# Altium PCB MotorDriver.PcbDoc
Units mm, origin at the board's own origin, x right, y up, seen from the top; angles counter-clockwise.
Board outline 57.78 x 52.83 mm, 2 copper layers (Top Layer, Bottom Layer); 15 components, 13 nets, 43 pads, 6 vias.
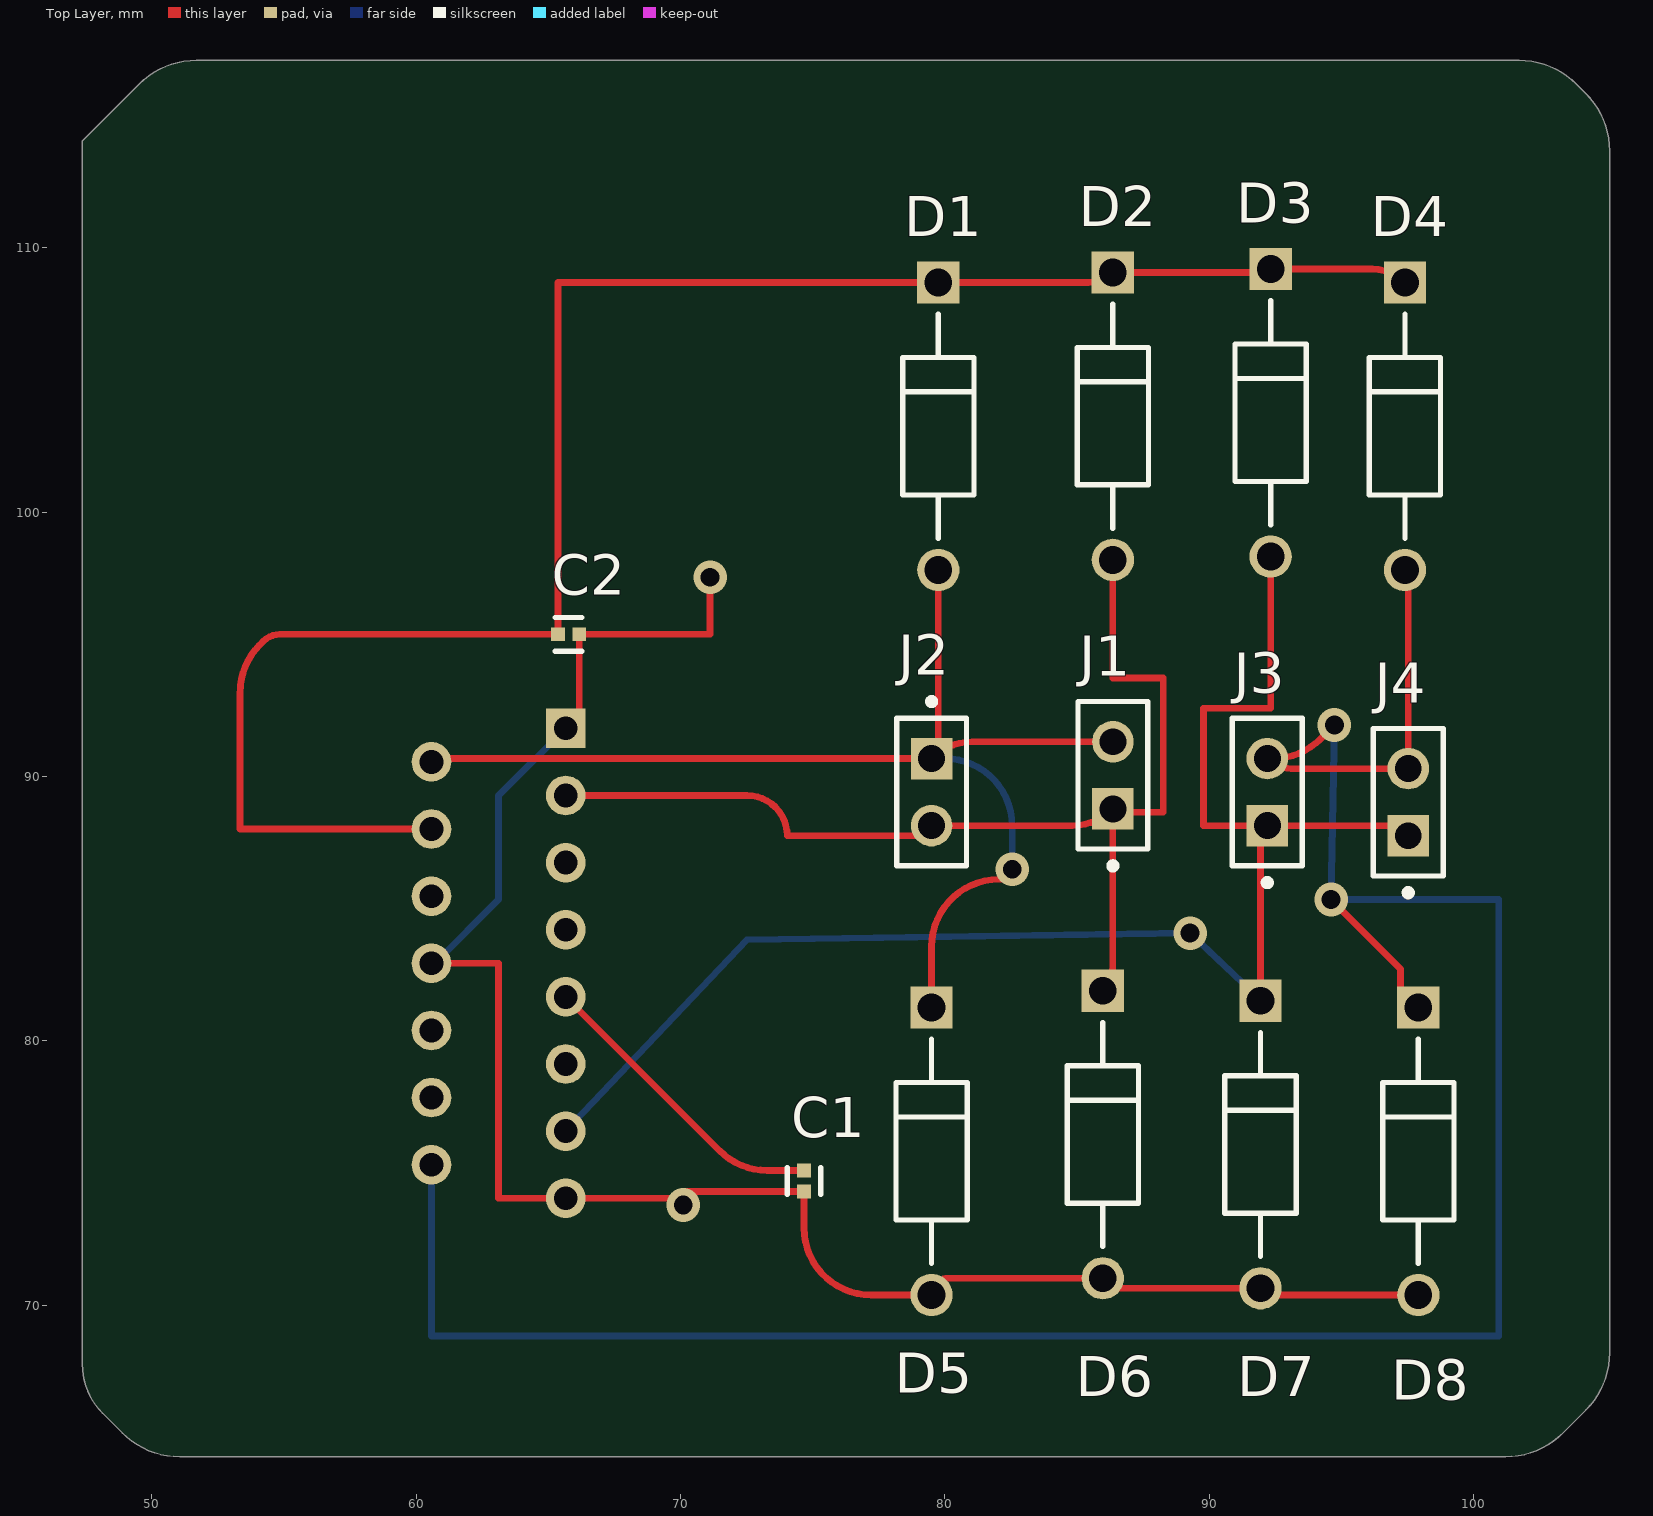
[diagram p0: Top Layer view]
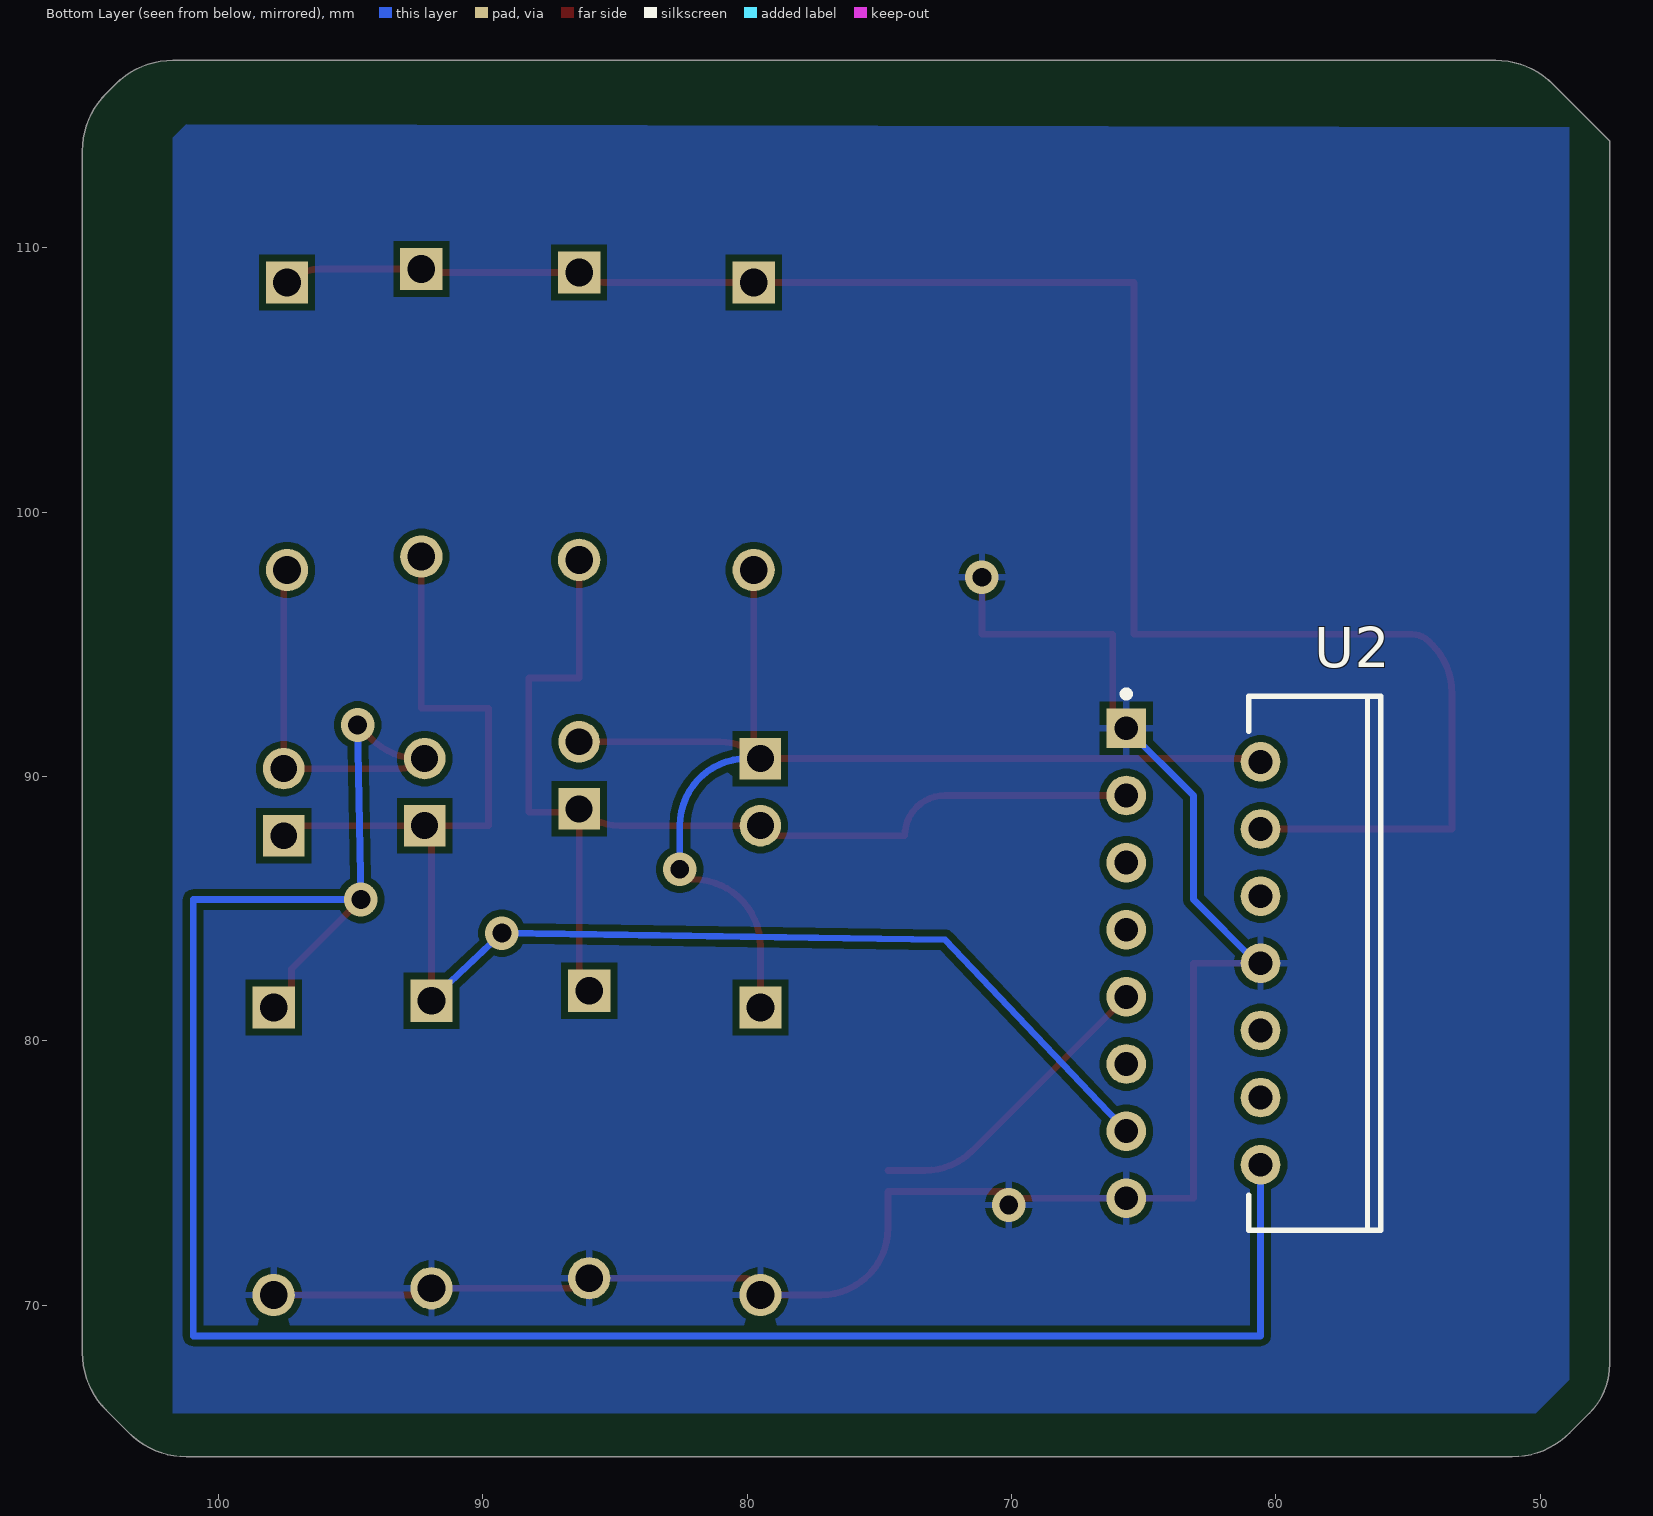
[diagram p1: Bottom Layer view, seen from below]
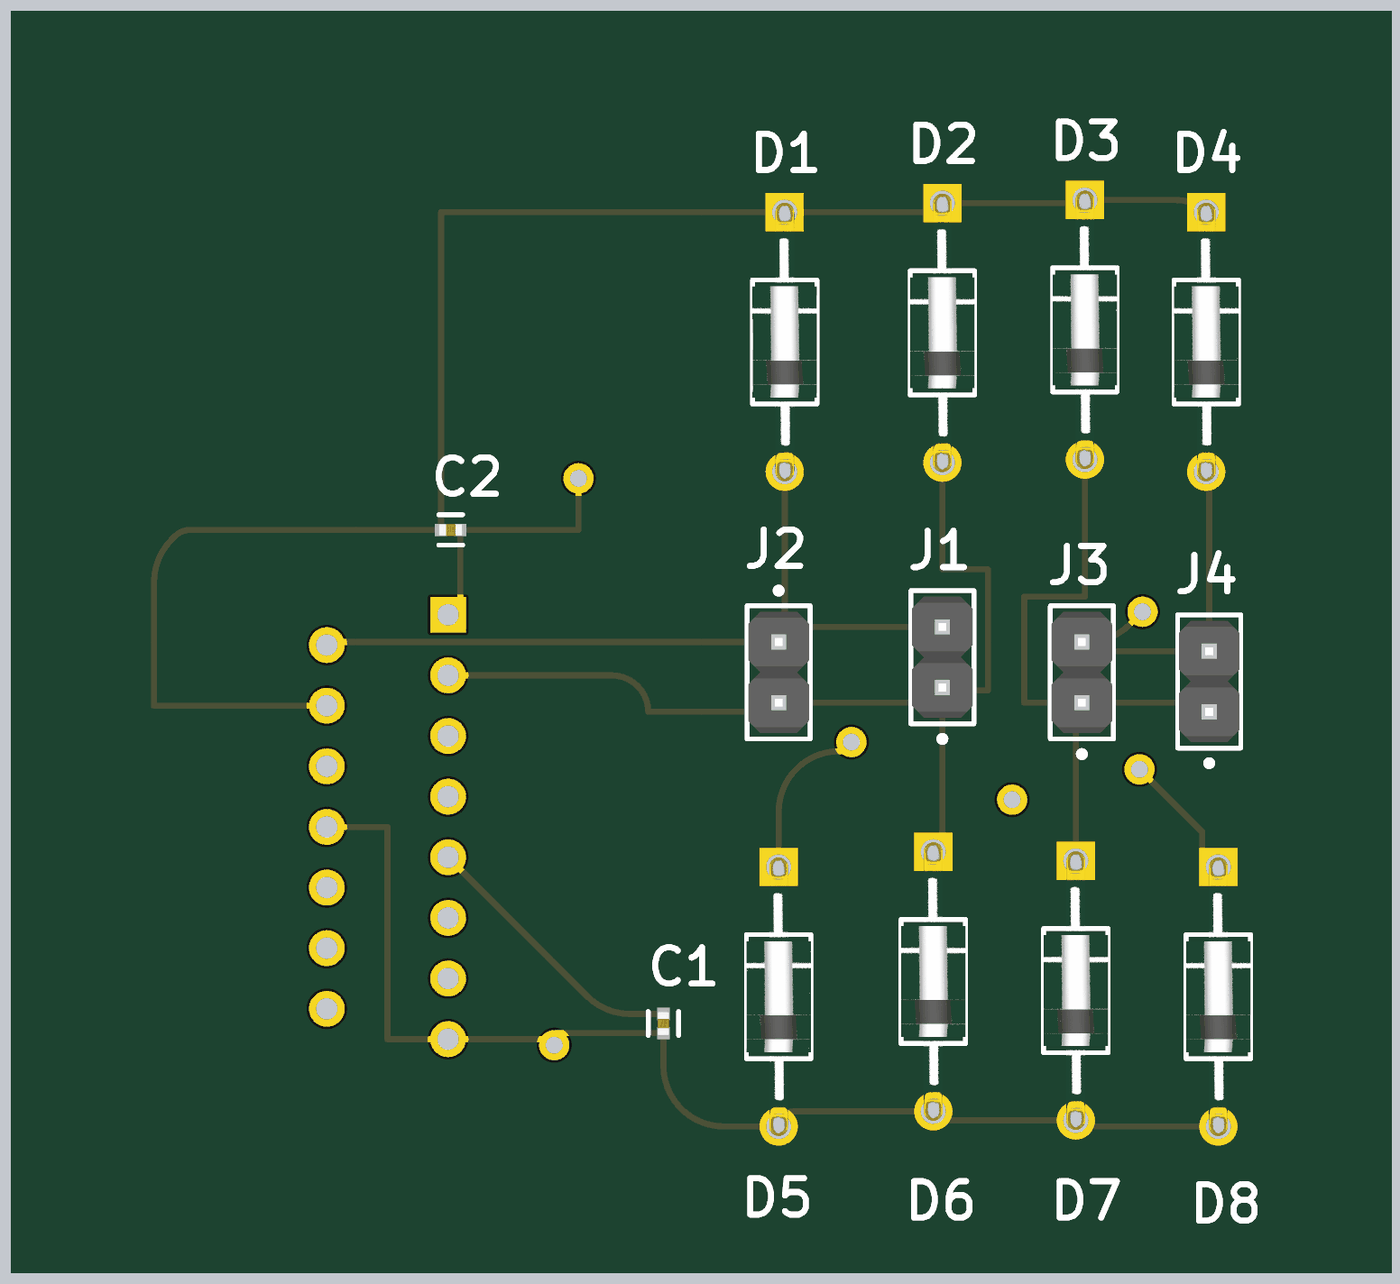
[diagram p2: 3D render of the assembled board from above, using the file's embedded part models]

## Layer stack, top to bottom
Top Solder: solder mask 0.0102, Solder Resist, Dk 3.5
Top Layer: signal copper 0.0356
Dielectric 1: dielectric 0.32, FR-4, Dk 4.8
Bottom Layer: signal copper 0.0356
Bottom Solder: solder mask 0.0102, Solder Resist, Dk 3.5

## Board outline
48.886,65.16 48.133,65.913 cw(c49.973,67.753) 47.371,67.753 47.371,114.046 49.521,116.196 cw(c51.689,114.028) 51.689,117.094 101.727,117.094 cw(c101.727,114.028) 103.895,116.196 104.258,115.833 cw(c102.09,113.665) 105.156,113.665 105.156,68.199 cw(c102.09,68.199) 104.258,66.031 103.387,65.16 cw(c101.219,67.328) 101.219,64.262 51.054,64.262 cw(c51.054,67.328)

## Design rules (kind name [scope] priority, off if disabled: settings)
Clearance [All] p1: gap=0.254 ignorepadtopadclearanceinfootprint=FALSE
PolygonConnect [All] p1: connectstyle=Relief reliefconductorwidth=0.254 reliefentries=4 polygonreliefangle="90 Angle" airgapwidth=0.254
RoutingVias [All] p1: holewidth=0.711 width=1.27 viastyle="Through Hole" minholewidth=0.711 minwidth=1.27 maxholewidth=0.711 maxwidth=1.27
SolderMaskExpansion [All] p1: expansion=0.102 istentingtop=FALSE
SupplyNets "Schematic Supply Nets_2" [InNet('GND')] p1: voltage=0.000
SupplyNets "Schematic Supply Nets_1" [InNet('+5v')] p2: voltage=0.000
SupplyNets "Schematic Supply Nets" [InNet('+9v')] p3: voltage=0.000
Width [All] p1: maxlimit=0.254 minlimit=0.254 preferedwidth=0.254
30 further rules are at their usual default settings.

## Components (designator, comment, footprint, x,y, rotation, side; value= is the part's Value field where it differs from the comment)
C1 "100nf" FP-C0402-BB-MFG 74.676,74.695 r270 top value="0.10 μF"
C2 "100nf" FP-C0402-BB-MFG 65.767,95.377 r0 top value="0.10 μF"
D1 "UF4007" FP-UF4007-MFG 79.756,103.251 r270 top value=17pF
D2 "UF4007" FP-UF4007-MFG 86.36,103.632 r270 top value=17pF
D3 "UF4007" FP-UF4007-MFG 92.329,103.759 r270 top value=17pF
D4 "UF4007" FP-UF4007-MFG 97.409,103.251 r270 top value=17pF
D5 "UF4007" FP-UF4007-MFG 79.502,75.819 r270 top value=17pF
D6 "" FP-UF4007-MFG 85.979,76.454 r270 top value=17pF
D7 "" FP-UF4007-MFG 91.948,76.073 r270 top value=17pF
D8 "" FP-UF4007-MFG 97.917,75.819 r270 top value=17pF
J1 "Motor 1" FP-M20-9990246-MFG 86.36,90.043 r90 top
J2 "Motor 2" FP-M20-9990246-MFG 79.502,89.408 r270 top
J3 "Motor 3" FP-M20-9990246-MFG 92.202,89.408 r90 top
J4 "Motor 4" FP-M20-9990246-MFG 97.536,89.027 r90 top
U2 "L298N" STM-FM-15 63.119,82.931 r180 bottom

## Footprints (in the part's own frame and the unit in brackets; to place one, negate y for a bottom-side part, rotate by r counter-clockwise, add the part's x,y. Pads: shape width x height; smd on the part's side, far side on the other; paste and mask are expansions set on the pad)
FP-C0402-BB-MFG [mm]
  rect 0.52x0.52 smd paste+0 mask+0: 1(-0.4,0) 2(0.4,0)
  silkscreen extent -0.5,-0.64 0.5,0.64, body extent -0.8,-0.4 0.8,0.4, height 0.25
FP-M20-9990246-MFG [mm]
  rect 1.57x1.57 hole 1.02 paste-2539.97 mask+0: 1(-1.27,0)
  round 1.57 hole 1.02 paste-2539.97 mask+0: 2(1.27,0)
  silkscreen extent -3.55,-1.32 2.79,1.32, body extent -2.89,-1.42 2.89,1.42, height 0.25
FP-UF4007-MFG [mm]
  rect 1.6x1.6 hole 1.05 paste-2539.97 mask+0: 1(-5.438,0)
  round 1.6 hole 1.05 paste-2539.97 mask+0: 2(5.438,0)
  silkscreen extent -4.24,-1.35 4.24,1.35, body extent -6.34,-1.45 6.34,1.45, height 0.25
STM-FM-15 [mm] "FM, 15-Leads, Body 20.2x5mm, Pitch 1.27mm"
  rect 1.5x1.5 hole 0.9: 1(-2.54,8.89)
  round 1.5 hole 0.9: 2(2.54,7.62) 3(-2.54,6.35) 4(2.54,5.08) 5(-2.54,3.81) 6(2.54,2.54) 7(-2.54,1.27) 8(2.54,0) 9(-2.54,-1.27) 10(2.54,-2.54) 11(-2.54,-3.81) 12(2.54,-5.08) 13(-2.54,-6.35) 14(2.54,-7.62) 15(-2.54,-8.89)
  silkscreen extent -2.67,-10.1 7.09,10.31, body extent -2.8,-10.1 7.09,10.1, height 21

## Part data
C1 C2: library part CMP-2008-02046-2, "CAP CER 0.1UF 10V X5R 0402", Capacitance="0.10 μF", Manufacturer=Kemet, Manufacturer Part Number=C0402C104K8PACTU, Package=C0402-BB, Temperature="-55°C to +125°C", Temperature Characteristic=X5R, Temperature Coefficient=15%, Temperature Range High=+125°C, Temperature Range Low=-55°C, Tolerance=0.1, Voltage Rating="10 V", Automotive=No, Category=Cap, ComponentLink2Description=Datasheet, ComponentLink2URL=https://content.kemet.com/datasheets/KEM_C1002_X7R_SMD.pdf, Device Class L1="Passive Components", Device Class L2=Capacitors, Device Class L3="Ceramic Capacitors", Digikey Description="CAP CER 0.1UF 10V X5R 0402", Height=0.55mm, Ipc Land Pattern Name=CAPC10050X50, Lead Free=Yes, Material=Ceramic, Mouser Description="Capacitor 100 nF 10 VDC 0402", Octopart=https://octopart.com/c0402c104k8pactu-kemet-140039, RoHS=TRUE
D1 D2 D3 D4 D5: library part CMP-02540-000043-1, "DIODE GEN PURP 1KV 1A DO204AL", Capacitance=17pF, Forward Current=1A, Manufacturer=Vishay, Manufacturer Part Number=UF4007-E3/54, Max Junction Temp=+150°C, Max Repetitive Reverse Voltage=1000V, Max Surge Forward Current=30A, Peak Reverse Current=10uA, Temperature="-55°C to +150°C", Temperature Range Low=-55°C, Automotive=No, Category=Diode, ComponentLink2Description=Datasheet, ComponentLink2URL=http://www.vishay.com/docs/88755/uf4001.pdf, Device Class L1="Discrete Semiconductors", Device Class L2=Diodes, Device Class L3="Rectifier Diodes", Digikey Description="DIODE GEN PURP 1KV 1A DO204AL", Height=2.7mm, Ipc Land Pattern Name=DIOPA1088W105L520D270, Lead Free=Yes, Mouser Description="Rectifiers Vr/1000V Io/1A", Octopart=https://octopart.com/uf4007-e3%2F54-vishay-42333894, Package=UF4007, RoHS=TRUE, Temperature Range High=+150°C
D6 D7 D8: library part CMP-02540-000043-1, "DIODE GEN PURP 1KV 1A DO204AL", Capacitance=17pF, Forward Current=1A, Manufacturer=Vishay, Manufacturer Part Number=UF4007-E3/54, Max Junction Temp=+150°C, Max Repetitive Reverse Voltage=1000V, Max Surge Forward Current=30A, Package=UF4007, Peak Reverse Current=10uA, Temperature="-55°C to +150°C", Temperature Range Low=-55°C, Automotive=No, Category=Diode, ComponentLink2Description=Datasheet, ComponentLink2URL=http://www.vishay.com/docs/88755/uf4001.pdf, Device Class L1="Discrete Semiconductors", Device Class L2=Diodes, Device Class L3="Rectifier Diodes", Digikey Description="DIODE GEN PURP 1KV 1A DO204AL", Height=2.7mm, Ipc Land Pattern Name=DIOPA1088W105L520D270, Lead Free=Yes, Mouser Description="Rectifiers Vr/1000V Io/1A", Octopart=https://octopart.com/uf4007-e3%2F54-vishay-42333894, RoHS=TRUE, Temperature Range High=+150°C
J1 J2 J3 J4: library part CMP-15831-000009-1, "CONN HEADER VERT 2POS 2.54MM", Current Rating=3A, Manufacturer=Harwin, Manufacturer Part Number=M20-9990246, Temperature="-40°C to +105°C", Temperature Range High=+105°C, Temperature Range Low=-40°C, Automotive=No, Category=Conn, ComponentLink2Description=Datasheet, ComponentLink2URL=https://cdn.harwin.com/pdfs/M20-999.pdf, Conn Gender=Male, Conn Orientation=Vertical, Contact Material=Tin,Nickel, Device Class L1=Connectors, Device Class L2="Headers and Wire Housings", Device Class L3=unset, Digikey Description="CONN HEADER VERT 2POS 2.54MM", Height=8.99mm, Lead Free=Yes, Mouser Description="2.54mm (0.1\") Pitch SIL Vertical PC Tail Pin Header, 6.1mm mating pin height, tin, 2 contacts", Number of Contacts=2, Number of Rows=1, Octopart=https://octopart.com/m20-9990246-harwin-2590635, Package=M20-9990246, Pitch=2.54mm, RoHS=TRUE
U2: library part CMP-2000-06526-1, "Dual Full-Bridge Driver, 4.8 to 46 V, -40 to 150 degC, 15-Pin FM (MW 15L), RoHS, Tube", Driver Case Style=Multiwatt, Manufacturer=STMicroelectronics, Operating Temperature Max=130°C, Operating Temperature Min=-25°C, Output Current=2A, Output Voltage=46V, Package Description="15-Pin Flange Mount, Body 5 x 19.6 mm, Pitch 1.27 mm", Package Reference=FM-15, PartNumber=L298, Supply Voltage Max=7V, Supply Voltage Min=4.5V, Automotive Qualification Standard=-, Datasheet URL=https://datasheet.ciiva.com/15109/getdatasheetpartid-50682-15109332.pdf, Datasheet Version=01/2000, Manufacturer URL=http://www.st.com/, Motor Type=FullBridge, Mounting Technology=ThroughHole, MSL=-, No. of Outputs=4Outputs, No. of Pins=15Pins, Packaging=Each, Product Range=-, SVHC=NoSVHC(17-Dec-2015)

## Via types
v1: diameter 1.27, hole 0.711, Top Layer to Bottom Layer, 6 vias

## Nets (pads, with @x,y where several pads share a name; then routed paths per layer and width w, separated by ;. In a path a pad name is that pad's centre, name@x,y a point inside that pad or via, vN(x,y) a via of type N, cw(c..) or ccw(c..) an arc to the next point about the centre after c; other vN are vias at no path point)
+5v: C1.1 U2.9 | length 11.6
  Top Layer w0.254: U2.9 71.481,75.839 ccw(c73.277,77.635) 73.277,75.095 C1.1
+9v: C2.1 D1.1 D2.1 D3.1 D4.1 U2.4 | length 71.4
  Top Layer w0.254: U2.4 53.34,88.011 53.34,93.182 cw(c55.88,93.182) 54.084,94.978 54.229,95.123 cw(c54.842,94.51) 54.842,95.377 C2.1 65.367,108.689 D1.1 85.44,108.689 ccw(c85.44,109.99) D2.1 92.022,109.07 ccw(c92.022,109.504) D3.1 96.183,109.197 cw(c96.183,107.463) D4.1
GND: C1.2 C2.2 D5.2 D6.2 D7.2 D8.2 U2.1 U2.8 U2.15 | length 72.5
  Top Layer w0.254: U2.8 63.119,82.931 63.119,74.041 U2.15 v1@70.104,74.041 ; U2.1 66.167,91.821 C2.2 71.12,95.377 v1(71.12,97.536) ; v1(70.104,73.787) v1@70.104,74.041 ; D8.2 92.202,70.381 cw(c92.202,70.635) D7.2 86.36,70.635 cw(c86.36,71.016) D6.2 80.137,71.016 ccw(c80.137,70.381) D5.2 77.216,70.381 cw(c77.216,72.921) 74.676,72.921 C1.2 70.104,74.295 v1@70.104,74.041
  Bottom Layer w0.254: U2.8 60.706,82.931 63.119,85.344 63.119,89.281 U2.1
NetD1_2: D1.2 D5.1 J1.2 J2.1 U2.2 | length 46.4
  Top Layer w0.254: U2.2 cw(c60.886,90.244) 60.886,90.678 J2.1 ; D5.1 79.502,83.566 cw(c82.042,83.566) 82.042,86.106 82.296,86.106 ccw(c82.296,86.36) 82.55,86.36 v1(82.55,86.487) ; D1.2 79.756,91.291 cw(c78.889,91.291) J2.1 ; J1.2 81.035,91.313 ccw(c81.035,89.145) J2.1
  Bottom Layer w0.254: J2.1 80.01,90.678 cw(c80.01,88.138) 82.55,88.138 v1(82.55,86.487)
NetD2_2: D2.2 D6.1 J1.1 J2.2 U2.3 | length 42.4
  Top Layer w0.254: U2.3 72.517,89.281 cw(c72.517,87.757) 74.041,87.757 79.121,87.757 ccw(c79.121,88.138) J2.2 84.827,88.138 ccw(c84.827,90.306) J1.1 ; D6.1 ccw(c85.059,82.812) 86.36,82.812 J1.1 ; D2.2 86.36,93.726 88.265,93.726 88.265,88.646 86.36,88.646 J1.1
NetD3_2: D3.2 D7.1 J3.1 J4.1 U2.13 | length 58
  Top Layer w0.254: D7.1 91.948,87.525 cw(c92.815,87.525) J3.1 ; D3.2@92.202,98.014 cw(c92.636,98.014) D3.2 92.329,92.583 89.789,92.583 89.789,88.138 J3.1 ; J4.1 ccw(c96.616,86.837) 96.616,88.138 J3.1
  Bottom Layer w0.254: U2.13 72.517,83.82 v1(89.281,84.074) 91.275,82.184 D7.1
NetD4_2: D4.2 D8.1 J3.2 J4.2 U2.14 | length 97.7
  Top Layer w0.254: v1(94.615,85.344) 97.244,82.715 97.244,81.93 D8.1 ; v1(94.742,91.948) 94.216,91.422 cw(c92.42,93.218) 92.42,90.678 J3.2 ccw(c93.122,91.598) 93.122,90.297 J4.2 97.536,97.506 ccw(c97.102,97.506) D4.2
  Bottom Layer w0.254: U2.14 60.579,68.834 100.965,68.834 100.965,85.344 v1(94.615,85.344) v1(94.742,91.948)
NetU2_5: U2.5
NetU2_6: U2.6
NetU2_7: U2.7
NetU2_10: U2.10
NetU2_11: U2.11
NetU2_12: U2.12

## Polygon pours and split planes (outlines as drawn)
GND on Bottom Layer "GND_L02_P001" (solid, pour order 1): 48.895,114.554 48.895,67.183 50.165,65.913 101.727,65.913 101.727,114.173 101.219,114.681